# Altium PCB PCB.PcbDoc
Units mil, origin at the board's own origin, x right, y up, seen from the top; angles counter-clockwise.
Board outline 6000 x 4000 mil, 2 copper layers (Top Layer, Bottom Layer); 156 components, 128 nets, 667 pads, 0 vias.
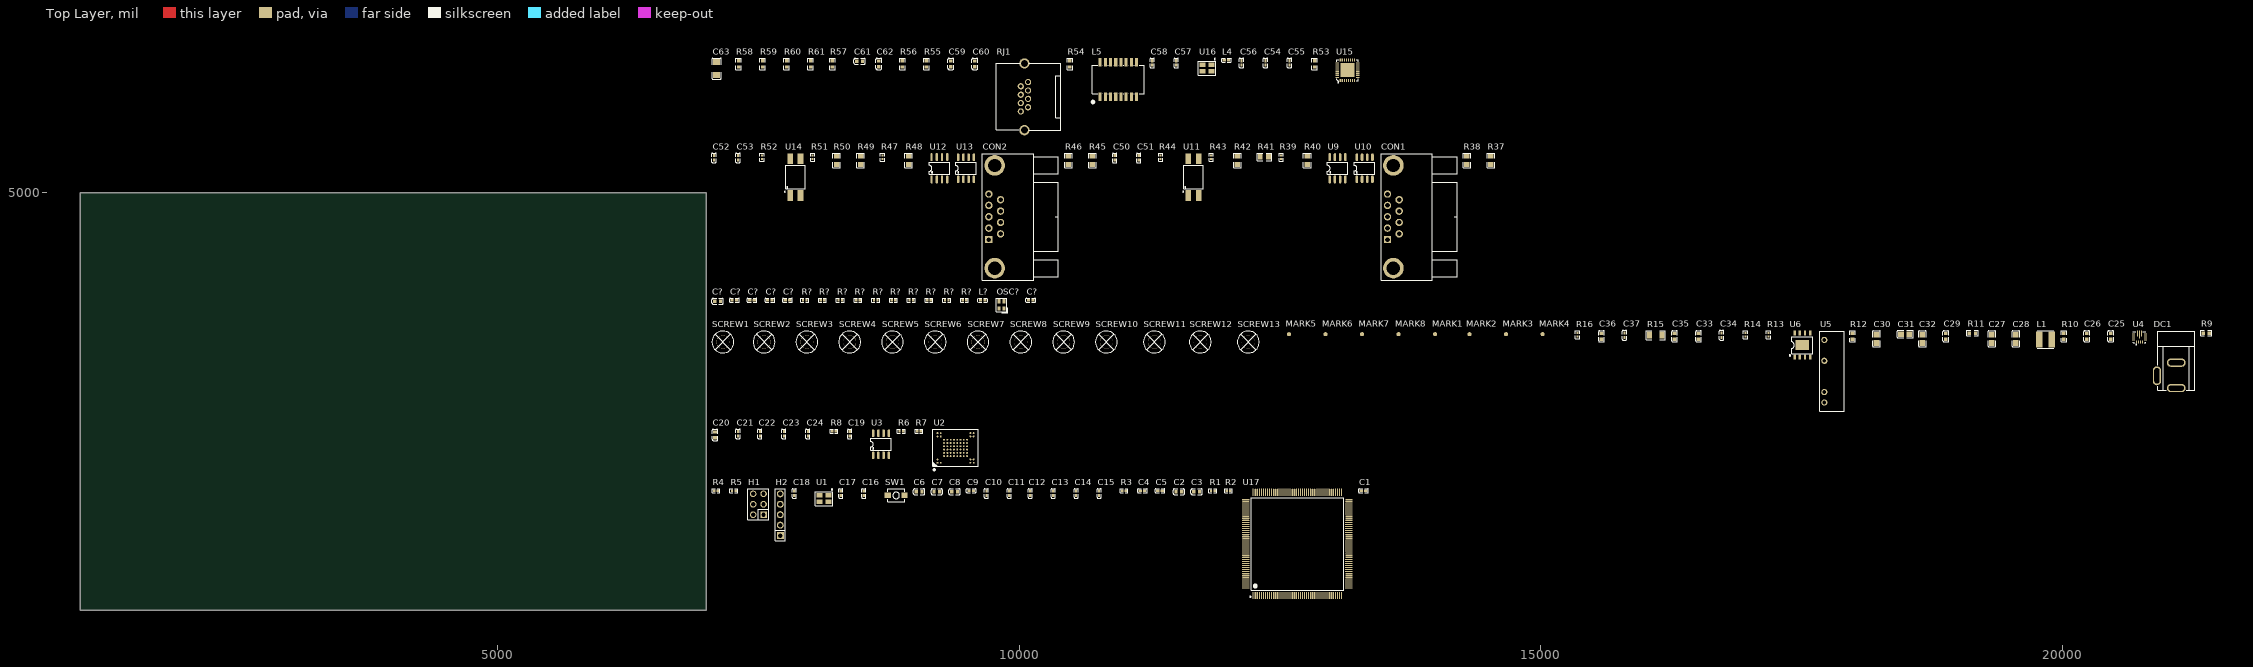
[diagram p0: Top Layer view]
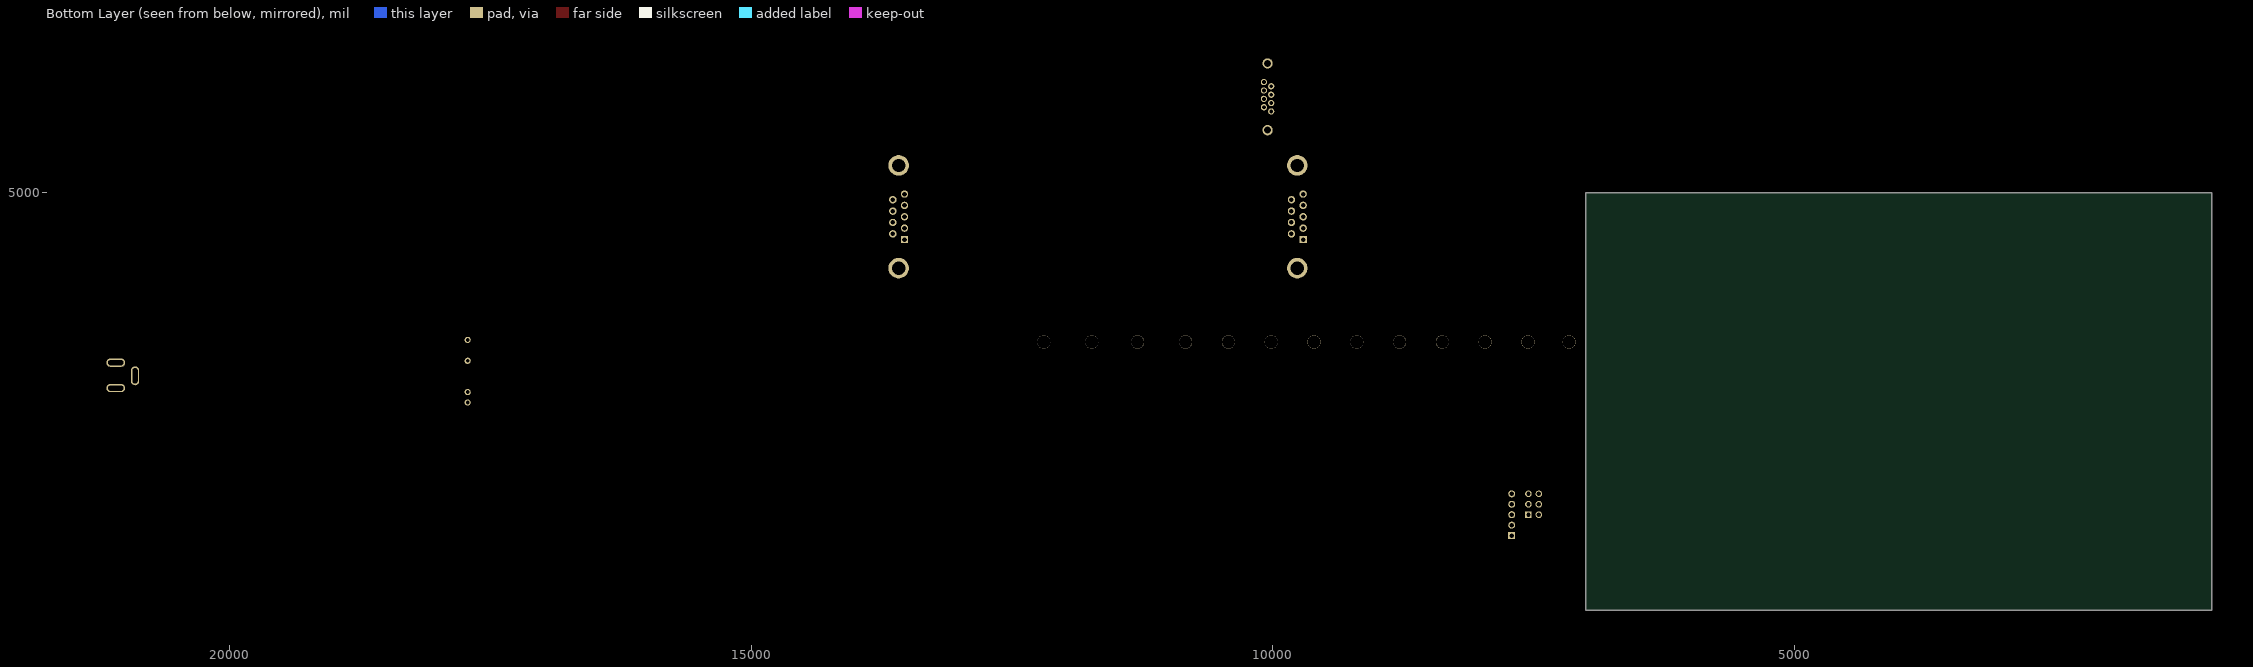
[diagram p1: Bottom Layer view, seen from below]

## Layer stack, top to bottom
Top Solder: solder mask 0.4, Solder Resist, Dk 3.5
Top Layer: signal copper 1.4
Dielectric 1: dielectric 12.6, FR-4, Dk 4.8
Bottom Layer: signal copper 1.4
Bottom Solder: solder mask 0.4, Solder Resist, Dk 3.5

## Board outline
1000,1000 7000,1000 7000,5000 1000,5000

## Design rules (kind name [scope] priority, off if disabled: settings)
Clearance [All] p1: gap=10 ignorepadtopadclearanceinfootprint=FALSE
MinimumSolderMaskSliver [All] p1: minsoldermaskwidth=0
PolygonConnect [All] p1: connectstyle=Relief reliefconductorwidth=10 reliefentries=4 polygonreliefangle="90 Angle" airgapwidth=10
RoutingVias [All] p1: holewidth=28 width=50 viastyle="Through Hole" minholewidth=28 minwidth=50 maxholewidth=28 maxwidth=50
SilkToSilkClearance [All] p1 off: silktosilkclearance=10
SilkToSolderMaskClearance [IsPad] p1: minsilkscreentomaskgap=0 clearancetoexposedcopper=TRUE
SolderMaskExpansion [All] p1 off: expansion=4 istentingtop=FALSE
Width [All] p1: maxlimit=10 minlimit=10 preferedwidth=10
27 further rules are at their usual default settings.

## Components (designator, comment, footprint, x,y, rotation, side; value= is the part's Value field where it differs from the comment)
C1 "100nF" C0402 13300,2145 r0 top
C2 "10uF" C0603 11530,2135 r0 top
C3 "10uF" C0603 11700,2135 r0 top
C4 "2.2uF" C0402 11180,2145 r0 top
C5 "2.2uF" C0402 11350,2145 r0 top
C6 "10uF" C0603 9040,2135 r0 top
C7 "10uF" C0603 9210,2135 r0 top
C8 "10uF" C0603 9380,2135 r0 top
C9 "100nF" C0402 9540,2145 r0 top
C10 "100nF" C0402 9685,2120 r90 top
C11 "100nF" C0402 9905,2120 r90 top
C12 "100nF" C0402 10105,2120 r90 top
C13 "100nF" C0402 10325,2120 r90 top
C14 "100nF" C0402 10545,2120 r90 top
C15 "100nF" C0402 10765,2120 r90 top
C16 "100nF" C0402 8510,2120 r90 top
C17 "22pF" C0402 8290,2120 r90 top
C18 "22pF" C0402 7845,2120 r90 top
C19 "100nF" C0402 8375,2690 r90 top
C20 "10uF" C0603 7085,2680 r90 top
C21 "100nF" C0402 7305,2690 r90 top
C22 "100nF" C0402 7515,2690 r90 top
C23 "100nF" C0402 7745,2690 r90 top
C24 "100nF" C0402 7975,2690 r90 top
C25 "10uF" C0603 20460,3625 r90 top
C26 "100nF" C0603 20230,3625 r90 top
C27 "10uF" C0805 19320,3600 r90 top
C28 "10uF" C0805 19550,3600 r90 top
C29 "10uF" C0603 18880,3625 r90 top
C30 "10uF" C0805 18215,3600 r90 top
C31 "10uF" C0805 18490,3645 r0 top
C32 "10uF" C0805 18655,3600 r90 top
C33 "10uF" C0603 16510,3625 r90 top
C34 "100nF" C0402 16730,3635 r90 top
C35 "10uF" C0603 16280,3625 r90 top
C36 "10uF" C0603 15580,3625 r90 top
C37 "100nF" C0402 15800,3635 r90 top
C50 "100nF" C0402 10915,5335 r90 top
C51 "100nF" C0402 11145,5335 r90 top
C52 "100nF" C0402 7075,5335 r90 top
C53 "100nF" C0402 7305,5335 r90 top
C54 "100nF" C0402 12360,6245 r90 top
C55 "22pF" C0402 12590,6245 r90 top
C56 "100nF" C0402 12130,6245 r90 top
C57 "100nF" C0402 11505,6245 r90 top
C58 "22pF" C0402 11275,6245 r90 top
C59 "100nF" C0603 9345,6235 r90 top
C60 "100nF" C0603 9575,6235 r90 top
C61 "100nF" C0603 8470,6260 r0 top
C62 "100nF" C0603 8655,6235 r90 top
C63 "1nF/2kV" C1206 7100,6190 r90 top
C? "???" C0402 7270,3970 r0 top
C? "???" C0402 10110,3970 r0 top
C? "???" C0402 7440,3970 r0 top
C? "???" C0402 7610,3970 r0 top
C? "10uF" C0603 7110,3960 r0 top
C? "???" C0402 7780,3970 r0 top
CON1 "DB9" DB9-TH_DT10121-M5N3-4F 13585,4770 r90 top
CON2 "DB9" DB9-TH_DT10121-M5N3-4F 9765,4770 r90 top
DC1 "" DC-005_2.5 21075,3255 r90 top
H1 "" HDR-TH_6P-P2.54-V-R2-C3-S2.54_A2541WV-2X3P 7500,2015 r90 top
H2 "" HDR-TH_5P-P2.54-V-M 7710,1915 r90 top
L1 "1.5uH" IND-SMD_L4.0-W4.0_FNR40XXS 19835,3595 r0 top
L4 "10uH" L0402 11985,6270 r0 top
L5 "H1102" XFMR-SMD_H1102N 10950,6085 r0 top
L? "10uH" L0402 9650,3970 r0 top
MARK1 "" Mark-Point-1mm 13985,3645 r90 top
MARK2 "" Mark-Point-1mm 14315,3645 r90 top
MARK3 "" Mark-Point-1mm 14665,3645 r90 top
MARK4 "" Mark-Point-1mm 15015,3645 r90 top
MARK5 "" Mark-Point-1mm 12585,3645 r90 top
MARK6 "" Mark-Point-1mm 12935,3645 r90 top
MARK7 "" Mark-Point-1mm 13285,3645 r90 top
MARK8 "" Mark-Point-1mm 13635,3645 r90 top
OSC? "48MHz" OSC-SMD_4P-L2.0-W1.6-BL 9830,3925 r90 top
R1 "10K" R0402 11855,2145 r0 top
R2 "10R" R0402 12005,2145 r0 top
R3 "10K" R0402 11005,2145 r0 top
R4 "10K" R0402 7095,2145 r0 top
R5 "10K" R0402 7265,2145 r0 top
R6 "10K" R0402 8870,2715 r0 top
R7 "10K" R0402 9040,2715 r0 top
R8 "10K" R0402 8225,2715 r0 top
R9 "10K" R0603 21375,3655 r0 top
R10 "100K" R0603 20010,3625 r90 top
R11 "680K" R0603 19135,3655 r0 top
R12 "130K" R0603 17985,3625 r90 top
R13 "10K" R0402 17180,3640 r90 top
R14 "56K" R0402 16960,3640 r90 top
R15 "510R" R1206 16100,3635 r0 top
R16 "10K" R0402 15350,3640 r90 top
R37 "0R" R0805 14520,5310 r90 top
R38 "DNP" R0805 14290,5310 r90 top
R39 "22R" R0402 12510,5340 r90 top
R40 "DNP" R0805 12760,5310 r90 top
R41 "DNP" R0805 12350,5345 r0 top
R42 "0R" R0805 12090,5310 r90 top
R43 "4.7K" R0402 11840,5340 r90 top
R44 "330R" R0402 11355,5340 r90 top
R45 "0R" R0805 10700,5310 r90 top
R46 "DNP" R0805 10470,5310 r90 top
R47 "22R" R0402 8690,5340 r90 top
R48 "DNP" R0805 8940,5310 r90 top
R49 "DNP" R0805 8480,5310 r90 top
R50 "0R" R0805 8250,5310 r90 top
R51 "4.7K" R0402 8020,5340 r90 top
R52 "330R" R0402 7535,5340 r90 top
R53 "2.49K" R0603 12830,6235 r90 top
R54 "49.9R" R0603 10485,6235 r90 top
R55 "49.9R" R0603 9110,6235 r90 top
R56 "49.9R" R0603 8880,6235 r90 top
R57 "49.9R" R0603 8210,6235 r90 top
R58 "75R" R0603 7310,6235 r90 top
R59 "75R" R0603 7540,6235 r90 top
R60 "75R" R0603 7770,6235 r90 top
R61 "75R" R0603 8000,6235 r90 top
R? "???" R0402 8455,3970 r0 top
R? "???" R0402 9475,3970 r0 top
R? "???" R0402 7945,3970 r0 top
R? "???" R0402 8115,3970 r0 top
R? "???" R0402 9305,3970 r0 top
R? "???" R0402 8625,3970 r0 top
R? "???" R0402 8795,3970 r0 top
R? "???" R0402 8965,3970 r0 top
R? "???" R0402 8285,3970 r0 top
R? "???" R0402 9135,3970 r0 top
RJ1 "RJ45" RJ45-TH_R-RJ45R10P-B000-1 10050,5920 r90 top
SCREW1 "" M3 7160,3570 r90 top
SCREW2 "" M3 7555,3570 r90 top
SCREW3 "" M3 7965,3570 r90 top
SCREW4 "" M3 8375,3570 r90 top
SCREW5 "" M3 8785,3570 r90 top
SCREW6 "" M3 9195,3570 r90 top
SCREW7 "" M3 9605,3570 r90 top
SCREW8 "" M3 10015,3570 r90 top
SCREW9 "" M3 10425,3570 r90 top
SCREW10 "" M3 10835,3570 r90 top
SCREW11 "" M3 11295,3570 r90 top
SCREW12 "" M3 11735,3570 r90 top
SCREW13 "" M3 12195,3570 r90 top
SW1 "" Key_SMD_3x4x2 8820,2100 r0 top
U1 "25MHz" CRYSTAL-SMD_4P-L3.2-W2.5-TR 8130,2070 r0 top
U2 "MT29F4G08A" VFBGA-63_L11.0-W9.0-P0.80-BL_MT29F2G08ABAEAH4-IT-E 9390,2555 r0 top
U3 "24C02" SOP-8_L4.9-W3.9-P1.27-LS6.0-BL 8675,2590 r0 top
U4 "TPS63070R" VQFN-HR-15_L3.0-W2.5-P0.50-BL_TPS63070RNMR 20735,3610 r0 top
U5 "NMV0505SAC" PWRM-TH_4P-L19.5-W6.0-P2.54_NMV0505SAC 17715,3290 r90 top
U6 "RT9048" ESOP-8_L4.9-W3.9-P1.27-LS6.0-BL-EP 17505,3540 r0 top
U9 "" SOIC-8_L5.0-W4.0-P1.27-LS6.0-BL 13050,5235 r0 top
U10 "" SOP-8_L4.9-W3.9-P1.27-LS6.0-BL 13310,5235 r0 top
U11 "" SOP-4_L6.5-W4.6-P2.54-LS10.3-TL 11670,5150 r90 top
U12 "" SOIC-8_L5.0-W4.0-P1.27-LS6.0-BL 9235,5235 r0 top
U13 "" SOP-8_L4.9-W3.9-P1.27-LS6.0-BL 9490,5235 r0 top
U14 "" SOP-4_L6.5-W4.6-P2.54-LS10.3-TL 7855,5150 r90 top
U15 "" QFN-32_L5.0-W5.0-P0.50-BL-EP3.4 13145,6175 r0 top
U16 "25MHz" CRYSTAL-SMD_4P-L3.2-W2.5-TR 11800,6195 r0 top
U17 "" LQFP-176_L24.0-W24.0-P0.50-LS26.0-BL 12665,1635 r0 top

## Footprints (in the part's own frame and the unit in brackets; to place one, negate y for a bottom-side part, rotate by r counter-clockwise, add the part's x,y. Pads: shape width x height; smd on the part's side, far side on the other; paste and mask are expansions set on the pad)
C0402 [mm]
  rect 0.79x0.54 smd paste-100 mask+0.051: 1(-0.545,0) 2(0.545,0)
  silkscreen extent -1.17,-0.5 1.17,0.5
C0603 [mm]
  rect 0.8x0.9 smd: 1(-0.7,0) 2(0.7,0)
  silkscreen extent -1.39,-0.71 1.39,0.71
C0805 [mm]
  rect 1.41x1.35 smd paste-100 mask+0.051: 1(-1,0) 2(1,0)
  silkscreen extent -1.96,-0.9 1.96,0.9
C1206 [mm]
  rect 1.485x1.728 smd paste-100 mask+0.051: 1(-1.593,0) 2(1.593,0)
  silkscreen extent -2.56,-1.09 2.56,1.09
CRYSTAL-SMD_4P-L3.2-W2.5-TR [mm]
  rect 1.4x1.15 smd: 1(1.1,0.8) 2(-1.1,0.8) 3(-1.1,-0.8) 4(1.1,-0.8)
  silkscreen extent -2.1,-1.7 2.1,2.35
DB9-TH_DT10121-M5N3-4F [mm]
  rect 1.8x1.8 hole 1.1: 1(-5.54,1.42)
  round 1.8 hole 1.1: 2(-2.77,1.42) 3(0,1.42) 4(2.77,1.42) 5(5.54,1.42) 6(-4.155,-1.42) 7(-1.385,-1.42) 8(1.385,-1.42) 9(4.155,-1.42)
  round 5 hole 3.25: 10(-12.5,0) 11(12.5,0)
  silkscreen extent -15.4,-15.5 15.4,3
DC-005_2.5 [mm]
  oval 2x4.6 hole 1.2 slot 3.7 at 90 deg paste-2539.97 mask+0.051: 1(-3.227,-0.318) 2(2.973,-0.318)
  oval 4.6x2 hole 1.2 slot 3.7 at 0 deg paste-2539.97 mask+0.051: 3(-0.227,4.382)
  silkscreen extent -3.73,-4.82 10.67,4.18
ESOP-8_L4.9-W3.9-P1.27-LS6.0-BL-EP [mm]
  rect 0.6x1.2 smd: 1(-1.905,-2.908) 2(-0.635,-2.908) 3(0.635,-2.908) 4(1.905,-2.908) 5(1.905,2.908) 6(0.635,2.908) 7(-0.635,2.908) 8(-1.905,2.908)
  rect 3.3x2.4 smd: 9(0,0)
  silkscreen extent -3.2,-2.67 2.55,2.05
HDR-TH_5P-P2.54-V-M [mm]
  rect 1.7x1.7 hole 1.1: 1(-5.08,0)
  round 1.7 hole 1.1: 2(-2.54,0) 3(0,0) 4(2.54,0) 5(5.08,0)
  silkscreen extent -6.35,-1.27 6.35,1.27
HDR-TH_6P-P2.54-V-R2-C3-S2.54_A2541WV-2X3P [mm]
  rect 1.6x1.6 hole 1.05: 1(-2.54,-1.27)
  round 1.6 hole 1.05: 2(-2.54,1.27) 3(0,-1.27) 4(0,1.27) 5(2.54,-1.27) 6(2.54,1.27)
  silkscreen extent -3.81,-2.54 3.81,2.54
IND-SMD_L4.0-W4.0_FNR40XXS [mm]
  rect 1.6x3.9 smd: 1(-1.5,0) 2(1.5,0)
  silkscreen extent -2,-2.1 2,2.1
Key_SMD_3x4x2 [mm]
  rect 1.53x1.36 smd paste+0 mask+0.051: 1(-2.035,0) 2(2.035,0)
  silkscreen extent -2.08,-1.58 2.08,1.58
L0402 [mm]
  rect 0.79x0.54 smd paste-100 mask+0.051: 1(-0.545,0) 2(0.545,0)
  silkscreen extent -1.17,-0.5 1.17,0.5
LQFP-176_L24.0-W24.0-P0.50-LS26.0-BL [mm]
  oval 0.28x1.8 smd: 1(-10.75,-12.55) 2(-10.25,-12.55) 3(-9.75,-12.55) 4(-9.25,-12.55) 5(-8.75,-12.55) 6(-8.25,-12.55) 7(-7.75,-12.55) 8(-7.25,-12.55) 9(-6.75,-12.55) 10(-6.25,-12.55) 11(-5.75,-12.55) 12(-5.25,-12.55) 13(-4.75,-12.55) 14(-4.25,-12.55) 15(-3.75,-12.55) 16(-3.25,-12.55) 17(-2.75,-12.55) 18(-2.25,-12.55) 19(-1.75,-12.55) 20(-1.25,-12.55) 21(-0.75,-12.55) 22(-0.25,-12.55) 23(0.25,-12.55) 24(0.75,-12.55) 25(1.25,-12.55) 26(1.75,-12.55) 27(2.25,-12.55) 28(2.75,-12.55) 29(3.25,-12.55) 30(3.75,-12.55) 31(4.25,-12.55) 32(4.75,-12.55) 33(5.25,-12.55) 34(5.75,-12.55) 35(6.25,-12.55) 36(6.75,-12.55) 37(7.25,-12.55) 38(7.75,-12.55) 39(8.25,-12.55) 40(8.75,-12.55) 41(9.25,-12.55) 42(9.75,-12.55) 43(10.25,-12.55) 44(10.75,-12.55) 89(10.75,12.55) 90(10.25,12.55) 91(9.75,12.55) 92(9.25,12.55) 93(8.75,12.55) 94(8.25,12.55) 95(7.75,12.55) 96(7.25,12.55) 97(6.75,12.55) 98(6.25,12.55) 99(5.75,12.55) 100(5.25,12.55) 101(4.75,12.55) 102(4.25,12.55) 103(3.75,12.55) 104(3.25,12.55) 105(2.75,12.55) 106(2.25,12.55) 107(1.75,12.55) 108(1.25,12.55) 109(0.75,12.55) 110(0.25,12.55) 111(-0.25,12.55) 112(-0.75,12.55) 113(-1.25,12.55) 114(-1.75,12.55) 115(-2.25,12.55) 116(-2.75,12.55) 117(-3.25,12.55) 118(-3.75,12.55) 119(-4.25,12.55) 120(-4.75,12.55) 121(-5.25,12.55) 122(-5.75,12.55) 123(-6.25,12.55) 124(-6.75,12.55) 125(-7.25,12.55) 126(-7.75,12.55) 127(-8.25,12.55) 128(-8.75,12.55) 129(-9.25,12.55) 130(-9.75,12.55) 131(-10.25,12.55) 132(-10.75,12.55)
  oval 1.8x0.28 smd: 45(12.55,-10.75) 46(12.55,-10.25) 47(12.55,-9.75) 48(12.55,-9.25) 49(12.55,-8.75) 50(12.55,-8.25) 51(12.55,-7.75) 52(12.55,-7.25) 53(12.55,-6.75) 54(12.55,-6.25) 55(12.55,-5.75) 56(12.55,-5.25) 57(12.55,-4.75) 58(12.55,-4.25) 59(12.55,-3.75) 60(12.55,-3.25) 61(12.55,-2.75) 62(12.55,-2.25) 63(12.55,-1.75) 64(12.55,-1.25) 65(12.55,-0.75) 66(12.55,-0.25) 67(12.55,0.25) 68(12.55,0.75) 69(12.55,1.25) 70(12.55,1.75) 71(12.55,2.25) 72(12.55,2.75) 73(12.55,3.25) 74(12.55,3.75) 75(12.55,4.25) 76(12.55,4.75) 77(12.55,5.25) 78(12.55,5.75) 79(12.55,6.25) 80(12.55,6.75) 81(12.55,7.25) 82(12.55,7.75) 83(12.55,8.25) 84(12.55,8.75) 85(12.55,9.25) 86(12.55,9.75) 87(12.55,10.25) 88(12.55,10.75) 133(-12.55,10.75) 134(-12.55,10.25) 135(-12.55,9.75) 136(-12.55,9.25) 137(-12.55,8.75) 138(-12.55,8.25) 139(-12.55,7.75) 140(-12.55,7.25) 141(-12.55,6.75) 142(-12.55,6.25) 143(-12.55,5.75) 144(-12.55,5.25) 145(-12.55,4.75) 146(-12.55,4.25) 147(-12.55,3.75) 148(-12.55,3.25) 149(-12.55,2.75) 150(-12.55,2.25) 151(-12.55,1.75) 152(-12.55,1.25) 153(-12.55,0.75) 154(-12.55,0.25) 155(-12.55,-0.25) 156(-12.55,-0.75) 157(-12.55,-1.25) 158(-12.55,-1.75) 159(-12.55,-2.25) 160(-12.55,-2.75) 161(-12.55,-3.25) 162(-12.55,-3.75) 163(-12.55,-4.25) 164(-12.55,-4.75) 165(-12.55,-5.25) 166(-12.55,-5.75) 167(-12.55,-6.25) 168(-12.55,-6.75) 169(-12.55,-7.25) 170(-12.55,-7.75) 171(-12.55,-8.25) 172(-12.55,-8.75) 173(-12.55,-9.25) 174(-12.55,-9.75) 175(-12.55,-10.25) 176(-12.55,-10.75)
  silkscreen extent -11.57,-13.03 11.25,11.25
M3 [mil]
  round 126 hole 126 paste-99999 mask+4: 1(0,0)
  silkscreen extent -105,-105 105,105
Mark-Point-1mm [mm]
  round 1 smd paste-25.4 mask+0.5: 1(0,0)
OSC-SMD_4P-L2.0-W1.6-BL [mm]
  rect 1x0.8 smd: 1(-0.9,-0.6) 2(0.9,-0.6) 3(0.9,0.6) 4(-0.9,0.6)
  silkscreen extent -1.89,-1.56 1.65,1.33
PWRM-TH_4P-L19.5-W6.0-P2.54_NMV0505SAC [mm]
  round 1.5 hole 0.9 paste-2539.97 mask+0.05: 1(-7.62,0) 2(-5.08,0) 5(2.54,0) 7(7.62,0)
  silkscreen extent -9.78,-4.83 9.78,1.14
QFN-32_L5.0-W5.0-P0.50-BL-EP3.4 [mm]
  rect 0.28x0.8 smd paste-100 mask+0.05: 1(-1.75,-2.5) 2(-1.251,-2.5) 3(-0.751,-2.5) 4(-0.251,-2.5) 5(0.249,-2.5) 6(0.749,-2.5) 7(1.249,-2.5) 8(1.749,-2.5) 17(1.752,2.5) 18(1.251,2.5) 19(0.752,2.5) 20(0.251,2.5) 21(-0.248,2.5) 22(-0.749,2.5) 23(-1.248,2.5) 24(-1.749,2.5)
  rect 0.8x0.28 smd paste-100 mask+0.05: 9(2.5,-1.748) 10(2.5,-1.248) 11(2.5,-0.748) 12(2.5,-0.248) 13(2.5,0.252) 14(2.5,0.752) 15(2.5,1.252) 16(2.5,1.752) 25(-2.5,1.75) 26(-2.5,1.25) 27(-2.5,0.75) 28(-2.5,0.25) 29(-2.5,-0.25) 30(-2.5,-0.75) 31(-2.5,-1.25) 32(-2.5,-1.75)
  rect 3.4x3.4 smd paste-100 mask+0.05: 33(0,0)
  silkscreen extent -2.6,-3.12 2.6,2.6
R0402 [mm]
  rect 0.566x0.54 smd paste-100 mask+0.051: 1(-0.433,0) 2(0.433,0)
  silkscreen extent -0.94,-0.5 0.94,0.5
R0603 [mil]
  rect 31.75x34.02 smd paste-3937.01 mask+2: 1(-29.66,0) 2(29.66,0)
  silkscreen extent -55,-26 55,26
R0805 [mm]
  rect 1.133x1.377 smd paste-100 mask+0.051: 1(-1,0) 2(1,0)
  silkscreen extent -1.76,-0.92 1.76,0.92
R1206 [mil]
  rect 47.54x66.97 smd paste-3937.01 mask+2: 1(-58.22,0) 2(58.22,0)
  silkscreen extent -91,-42 91,42
RJ45-TH_R-RJ45R10P-B000-1 [mil]
  round 60 hole 36 paste-99999 mask+1.97: 1(140.55,-35.04) 2(100.39,35.04) 3(60.23,-35.04) 4(20.08,35.04) 5(-20.08,-35.04) 6(-60.24,35.04) 7(-100.4,-35.04) 8(-140.55,35.04)
  round 98.42 hole 66.93 paste-99999 mask+1.97: 9(319.89,0) 10(-319.89,0)
  silkscreen extent -320,-350 320,270
SOIC-8_L5.0-W4.0-P1.27-LS6.0-BL [mil]
  oval 22.38x76.78 smd: 1(-75,-106.5) 2(-25,-106.5) 3(25,-106.5) 4(75,-106.5) 5(75,106.5) 6(25,106.5) 7(-25,106.5) 8(-75,106.5)
  silkscreen extent -98,-59 98,59
SOP-4_L6.5-W4.6-P2.54-LS10.3-TL [mil]
  rect 102.36x56 smd: 1(-175.2,50) 2(-175.2,-50) 3(175.2,-50) 4(175.2,50)
  silkscreen extent -145,-94 112,105
SOP-8_L4.9-W3.9-P1.27-LS6.0-BL [mm]
  oval 0.63x1.865 smd: 1(-1.905,-2.682) 2(-0.635,-2.682) 3(0.635,-2.682) 4(1.905,-2.682) 5(1.905,2.682) 6(0.635,2.682) 7(-0.635,2.682) 8(-1.905,2.682)
  silkscreen extent -2.5,-1.5 2.5,1.48
VFBGA-63_L11.0-W9.0-P0.80-BL_MT29F2G08ABAEAH4-IT-E [mm]
  round 0.45 smd: A1(-4.4,-3.6) A2(-4.4,-2.8) A9(-4.4,2.8) A10(-4.4,3.6) B1(-3.6,-3.6) B9(-3.6,2.8) B10(-3.6,3.6) C3(-2.8,-2) C4(-2.8,-1.2) C5(-2.8,-0.4) C6(-2.8,0.4) C7(-2.8,1.2) C8(-2.8,2) D3(-2,-2) D4(-2,-1.2) D5(-2,-0.4) D6(-2,0.4) D7(-2,1.2) D8(-2,2) E3(-1.2,-2) E4(-1.2,-1.2) E5(-1.2,-0.4) E6(-1.2,0.4) E7(-1.2,1.2) E8(-1.2,2) F3(-0.4,-2) F4(-0.4,-1.2) F5(-0.4,-0.4) F6(-0.4,0.4) F7(-0.4,1.2) F8(-0.4,2) G3(0.4,-2) G4(0.4,-1.2) G5(0.4,-0.4) G6(0.4,0.4) G7(0.4,1.2) G8(0.4,2) H3(1.2,-2) H4(1.2,-1.2) H5(1.2,-0.4) H6(1.2,0.4) H7(1.2,1.2) H8(1.2,2) J3(2,-2) J4(2,-1.2) J5(2,-0.4) J6(2,0.4) J7(2,1.2) J8(2,2) K3(2.8,-2) K4(2.8,-1.2) K5(2.8,-0.4) K6(2.8,0.4) K7(2.8,1.2) K8(2.8,2) L1(3.6,-3.6) L2(3.6,-2.8) L9(3.6,2.8) L10(3.6,3.6) M1(4.4,-3.6) M2(4.4,-2.8) M9(4.4,2.8) M10(4.4,3.6)
  silkscreen extent -5.5,-5.5 5.5,4.5
VQFN-HR-15_L3.0-W2.5-P0.50-BL_TPS63070RNMR [mm]
  rect 0.25x0.7 smd: 1(-0.75,-1.016) 2(-0.25,-1.016) 3(0.25,-1.016) 4(0.75,-1.016)
  rect 0.7x0.25 smd: 5(1.45,-0.566) 6(1.45,-0.066) 7(1.45,0.434) 8(1.45,0.934) 12(-1.45,0.934) 13(-1.45,0.434) 14(-1.45,-0.066) 15(-1.45,-0.566)
  rect 0.25x1.45 smd: 9(0.5,1.016) 11(-0.5,1.016)
  rect 0.25x1.85 smd: 10(0,0.816)
  silkscreen extent -1.5,-1.73 1.5,1.44
XFMR-SMD_H1102N [mm]
  rect 0.75x2 smd: 1(-4.445,-4.2) 2(-3.175,-4.2) 3(-1.905,-4.2) 4(-0.635,-4.2) 5(0.635,-4.2) 6(1.905,-4.2) 7(3.175,-4.2) 8(4.445,-4.2) 9(4.445,4.2) 10(3.175,4.2) 11(1.905,4.2) 12(0.635,4.2) 13(-0.635,4.2) 14(-1.905,4.2) 15(-3.175,4.2) 16(-4.445,4.2)
  silkscreen extent -6.73,-5.99 6.35,3.5

## Part data
C1 C4 C5 C9 C10 C11 C12 C13 C14 C15 C16 C17 C18 C19 C21 C22 C23 C24 C34 C37 C50 C51 C52 C53 C54 C55 C56 C57 C58 C? C? C? C? C?: library part CAP_0402, Add into BOM=yes, Convert to PCB=yes, Device=CAP_0402, Symbol=CapAcitance
C2 C3 C6 C7 C8 C20 C25 C26 C29 C33 C35 C36 C59 C60 C61 C62 C?: library part CAP_0603, Add into BOM=yes, Convert to PCB=yes, Device=CAP_0603, Symbol=CapAcitance
C27 C28 C30 C31 C32: library part CAP_0805, Add into BOM=yes, Convert to PCB=yes, Device=CAP_0805, Symbol=CapAcitance
C63: library part 1206B102K202NT, Tolerance=±10%, Add into BOM=yes, Convert to PCB=yes, Device=1206B102K202NT, Symbol=1206B102K202NT
CON1 CON2: library part "DB9 TH90", Add into BOM=yes, Convert to PCB=yes, Device="DB9 TH90", Manufacturer Part=DB9, Symbol="DB9 TH90"
DC1: library part DC-005_2.5, Add into BOM=yes, Convert to PCB=yes, Device=DC-005_2.5, Symbol=DC-005_2.5
H1: library part HDR-M_2.54_2x3, Add into BOM=yes, Convert to PCB=yes, Device=HDR-M_2.54_2x3, Symbol=HDR-M-2.54_2x3
H2: library part HDR-M_2.54_1x5P, Add into BOM=yes, Convert to PCB=yes, Device=HDR-M_2.54_1x5P, Symbol=MTP125-1105S1
L1: library part FNR4020S1R5MT, Tolerance=±20%, Add into BOM=yes, Convert to PCB=yes, Device=FNR4020S1R5MT, Symbol=FNR4020S1R5MT
L4 L?: library part L_0402, Add into BOM=yes, Convert to PCB=yes, Device=L_0402, Symbol=SDCL1005C10NJTDFM01
L5: library part H1102N, Add into BOM=yes, Convert to PCB=yes, Device=H1102N, Symbol=H1102N
MARK1 MARK2 MARK3 MARK4 MARK5 MARK6 MARK7 MARK8: library part Mark-Point, Add into BOM=no, Convert to PCB=yes, Device=Mark-Point, Symbol=Mark-Point
OSC?: library part CA20C4805INT, JLCPCB Part Class=扩展库, Manufacturer=CTS(西迪斯), operating temperature=-40℃~+85℃, Supply Current (Max)=15mA, Supply Voltage=2.5V, Add into BOM=yes, Convert to PCB=yes, Datasheet=https://atta.szlcsc.com/upload/public/pdf/source/20210702/BDFC52EAD60C3547BAEE0A1F7A9586ED.pdf, Device=CA20C4805INT, LCSC Part Name=CA20C4805INT, Manufacturer Part=CA20C4805INT, Output Type=HCMOS；TTL, Supplier=LCSC, Supplier Footprint=SMD2016-4P, Supplier Part=C1990976, Symbol=CA20C4805INT
R1 R2 R3 R4 R5 R6 R7 R8 R13 R14 R16 R39 R43 R44 R47 R51 R52 R? R? R? R? R? R? R? R? R? R?: library part Res_0402, Add into BOM=yes, Convert to PCB=yes, Device=Res_0402, Symbol=电阻
R9 R10 R11 R12 R53 R54 R55 R56 R57 R58 R59 R60 R61: library part Res_0603, Add into BOM=yes, Convert to PCB=yes, Device=Res_0603, Symbol=电阻
R15: library part Res_1206, Add into BOM=yes, Convert to PCB=yes, Device=Res_1206, Symbol=电阻
R37 R38 R40 R41 R42 R45 R46 R48 R49 R50: library part Res_0805, Add into BOM=yes, Convert to PCB=yes, Device=Res_0805, Symbol=电阻
RJ1: library part RJ45-9758-1, Add into BOM=yes, Convert to PCB=yes, Device=RJ45-9758-1, Manufacturer Part=RJ45, Symbol=RJ45-9758-1
SCREW1 SCREW2 SCREW3 SCREW4 SCREW5 SCREW6 SCREW7 SCREW8 SCREW9 SCREW10 SCREW11 SCREW12 SCREW13: library part M3螺丝, Add into BOM=yes, Convert to PCB=yes, Device=M3螺丝, Supplier Footprint=插件, Symbol=螺丝孔
SW1: library part Key_SMD_3x4x2, Add into BOM=yes, Convert to PCB=yes, Device=Key_SMD_3x4x2, Supplier Footprint=SMD, Symbol=轻触按键x2
U4: library part TPS63070RNMR, Output Current=-, Add into BOM=yes, Convert to PCB=yes, Device=TPS63070RNMR, Manufacturer Part=TPS63070R, Symbol=TPS63070RNMR
U6: library part RT9048GSP, Add into BOM=yes, Convert to PCB=yes, Device=RT9048GSP, Manufacturer Part=RT9048, Symbol=RT9048GSP
U9 U12: library part ISO7221AD, Add into BOM=yes, Convert to PCB=yes, Device=ISO7221AD, Symbol=ISO7221AD
U10 U13: library part RS485, Add into BOM=yes, Convert to PCB=yes, Device=RS485, Symbol=RS485
U11 U14: library part TLP781(GR-TP6,F), Add into BOM=yes, Convert to PCB=yes, Device=TLP781(GR-TP6,F), Symbol=TLP781(GR-TP6，F)
U15: library part YT8512C, Add into BOM=yes, Convert to PCB=yes, Device=YT8512C, Symbol=YT8512C
U17: library part STM32F429IGT6, Add into BOM=yes, Applications=-, Convert to PCB=yes, Device=STM32F429IGT6, Relevance=|, Symbol=STM32F429IGT6
U1 U16: Add into BOM=yes, Convert to PCB=yes, Device=25MHz, Manufacturer Part=25MHz, Symbol=25MHZ
U2: Add into BOM=yes, Convert to PCB=yes, Device=MT29F4G08A, Manufacturer Part=MT29F4G08A, Symbol=MT29F4G08A
U3: Add into BOM=yes, Convert to PCB=yes, Device=24C02, Manufacturer Part=24C02, Symbol=24C02
U5: Add into BOM=yes, Convert to PCB=yes, Device=NMV0505SAC, Manufacturer Part=NMV0505SAC, Symbol=NMV0505SAC

## Nets (pads, with @x,y where several pads share a name; then routed paths per layer and width w, separated by ;. In a path a pad name is that pad's centre, name@x,y a point inside that pad or via, vN(x,y) a via of type N, cw(c..) or ccw(c..) an arc to the next point about the centre after c; other vN are vias at no path point)
BOOT0: 
BOOT1: 
DGND: 
ETH_MDC: 
ETH_MDIO: 
ETH_OSCI: 
ETH_OSCO: 
ETH_RX_N: 
ETH_RX_P: 
ETH_TX_N: 
ETH_TX_P: 
FMC_ALE: 
FMC_CLE: 
FMC_D0: 
FMC_D1: 
FMC_D2: 
FMC_D3: 
FMC_D4: 
FMC_D5: 
FMC_D6: 
FMC_D7: 
FMC_N_CE: 
FMC_N_OE: 
FMC_N_WAIT: 
FMC_N_WE: 
GROUND: 
IIC_SCL: 
IIC_SDA: 
NetC1_2: 
NetC2_2: 
NetC4_2: 
NetC5_2: 
NetC26_1: 
NetC54_1: 
NetC56_2: 
NetC57_2: 
NetC59_2: 
NetC60_2: 
NetC61_2: 
NetC62_2: 
NetC63_2: 
NetCON1_5: 
NetCON1_6: 
NetCON2_5: 
NetCON2_6: 
NetH1_3: 
NetH1_4: 
NetL1_1: 
NetL1_2: 
NetL5_10: 
NetL5_15: 
NetR1_2: 
NetR8_2: 
NetR9_1: 
NetR10_1: 
NetR11_2: 
NetR13_2: 
NetR14_2: 
NetR39_2: 
NetR43_1: 
NetR44_2: 
NetR47_2: 
NetR51_1: 
NetR52_2: 
NetR53_2: 
NetR60_2: 
NetR61_2: 
NetU9_6: 
NetU9_7: 
NetU10_2: 
NetU12_6: 
NetU12_7: 
NetU13_2: 
OSC_IN: 
OSC_OUT: 
PB1_RTS: 
PB1_RXD: 
PB1_TXD: 
PB2_RTS: 
PB2_RXD: 
PB2_TXD: 
PBUS1_A: 
PBUS1_B: 
PBUS2_A: 
PBUS2_B: 
PF_AB0: 
PF_AB1: 
PF_AB2: 
PF_AB3: 
PF_AB4: 
PF_AB5: 
PF_AB6: 
PF_AB7: 
PF_AB8: 
PF_AB9: 
PF_AB10: 
PF_DB0: 
PF_DB1: 
PF_DB2: 
PF_DB3: 
PF_DB4: 
PF_DB5: 
PF_DB6: 
PF_DB7: 
PF_NCS1: 
PF_NCS2: 
PF_NRD: 
PF_NREADY1: 
PF_NREADY2: 
PF_NWR: 
RESET: 
RMII_CRS_DV: 
RMII_RXD0: 
RMII_RXD1: 
RMII_TX_EN: 
RMII_TXD0: 
RMII_TXD1: 
RX_N: 
RX_P: 
SWCLK: 
SWDIO: 
TX_N: 
TX_P: 
VCC33V: 
VDD50V: 
VIN12V: 
XGND: 
XVDD50V: 
pads on no net: C1.1 C1.2 C2.1 C2.2 C3.1 C3.2 C4.1 C4.2 C5.1 C5.2 C6.1 C6.2 C7.1 C7.2 C8.1 C8.2 C9.1 C9.2 C10.1 C10.2 C11.1 C11.2 C12.1 C12.2 C13.1 C13.2 C14.1 C14.2 C15.1 C15.2 C16.1 C16.2 C17.1 C17.2 C18.1 C18.2 C19.1 C19.2 C20.1 C20.2 C21.1 C21.2 C22.1 C22.2 C23.1 C23.2 C24.1 C24.2 C25.1 C25.2 C26.1 C26.2 C27.1 C27.2 C28.1 C28.2 C29.1 C29.2 C30.1 C30.2 C31.1 C31.2 C32.1 C32.2 C33.1 C33.2 C34.1 C34.2 C35.1 C35.2 C36.1 C36.2 C37.1 C37.2 C50.1 C50.2 C51.1 C51.2 C52.1 C52.2 C53.1 C53.2 C54.1 C54.2 C55.1 C55.2 C56.1 C56.2 C57.1 C57.2 C58.1 C58.2 C59.1 C59.2 C60.1 C60.2 C61.1 C61.2 C62.1 C62.2 C63.1 C63.2 C?.1 C?.2 CON1.1 CON1.2 CON1.3 CON1.4 CON1.5 CON1.6 CON1.7 CON1.8 CON1.9 CON1.10 CON1.11 CON2.1 CON2.2 CON2.3 CON2.4 CON2.5 CON2.6 CON2.7 CON2.8 CON2.9 CON2.10 CON2.11 DC1.1 DC1.2 DC1.3 H1.1 H1.2 H1.3 H1.4 H1.5 H1.6 H2.1 H2.2 H2.3 H2.4 H2.5 L1.1 L1.2 L4.1 L4.2 L5.1 L5.2 L5.3 L5.4 L5.5 L5.6 L5.7 L5.8 L5.9 L5.10 L5.11 L5.12 L5.13 L5.14 L5.15 L5.16 L?.1 L?.2 MARK1.1 MARK2.1 MARK3.1 MARK4.1 MARK5.1 MARK6.1 MARK7.1 MARK8.1 OSC?.1 OSC?.2 OSC?.3 OSC?.4 R1.1 R1.2 R2.1 R2.2 R3.1 R3.2 R4.1 R4.2 R5.1 R5.2 R6.1 R6.2 R7.1 R7.2 R8.1 R8.2 R9.1 R9.2 R10.1 R10.2 R11.1 R11.2 R12.1 R12.2 R13.1 R13.2 R14.1 R14.2 R15.1 R15.2 R16.1 R16.2 R37.1 R37.2 R38.1 R38.2 R39.1 R39.2 R40.1 R40.2 R41.1 R41.2 R42.1 R42.2 R43.1 R43.2 R44.1 R44.2 R45.1 R45.2 R46.1 R46.2 R47.1 R47.2 R48.1 R48.2 R49.1 R49.2 R50.1 R50.2 R51.1 R51.2 R52.1 R52.2 R53.1 R53.2 R54.1 R54.2 R55.1 R55.2 R56.1 R56.2 R57.1 R57.2 R58.1 R58.2 R59.1 R59.2 R60.1 R60.2 R61.1 R61.2 R?.1 R?.2 RJ1.1 RJ1.2 RJ1.3 RJ1.4 RJ1.5 RJ1.6 RJ1.7 RJ1.8 RJ1.9 RJ1.10 SCREW1.1 SCREW2.1 SCREW3.1 SCREW4.1 SCREW5.1 SCREW6.1 SCREW7.1 SCREW8.1 SCREW9.1 SCREW10.1 SCREW11.1 SCREW12.1 SCREW13.1 SW1.1 SW1.2 U1.1 U1.2 U1.3 U1.4 U2.A1 U2.A2 U2.A9 U2.A10 U2.B1 U2.B9 U2.B10 U2.C3 U2.C4 U2.C5 U2.C6 U2.C7 U2.C8 U2.D3 U2.D4 U2.D5 U2.D6 U2.D7 U2.D8 U2.E3 U2.E4 U2.E5 U2.E6 U2.E7 U2.E8 U2.F3 U2.F4 U2.F5 U2.F6 U2.F7 U2.F8 U2.G3 U2.G4 U2.G5 U2.G6 U2.G7 U2.G8 U2.H3 U2.H4 U2.H5 U2.H6 U2.H7 U2.H8 U2.J3 U2.J4 U2.J5 U2.J6 U2.J7 U2.J8 U2.K3 U2.K4 U2.K5 U2.K6 U2.K7 U2.K8 U2.L1 U2.L2 U2.L9 U2.L10 U2.M1 U2.M2 U2.M9 U2.M10 U3.1 U3.2 U3.3 U3.4 U3.5 U3.6 U3.7 U3.8 U4.1 U4.2 U4.3 U4.4 U4.5 U4.6 U4.7 U4.8 U4.9 U4.10 U4.11 U4.12 U4.13 U4.14 U4.15 U5.1 U5.2 U5.5 U5.7 U6.1 U6.2 U6.3 U6.4 U6.5 U6.6 U6.7 U6.8 U6.9 U9.1 U9.2 U9.3 U9.4 U9.5 U9.6 U9.7 U9.8 U10.1 U10.2 U10.3 U10.4 U10.5 U10.6 U10.7 U10.8 U11.1 U11.2 U11.3 U11.4 U12.1 U12.2 U12.3 U12.4 U12.5 U12.6 U12.7 U12.8 U13.1 U13.2 U13.3 U13.4 U13.5 U13.6 U13.7 U13.8 U14.1 U14.2 U14.3 U14.4 U15.1 U15.2 U15.3 U15.4 U15.5 U15.6 U15.7 U15.8 U15.9 U15.10 U15.11 U15.12 U15.13 U15.14 U15.15 U15.16 U15.17 U15.18 U15.19 U15.20 U15.21 U15.22 U15.23 U15.24 U15.25 U15.26 U15.27 U15.28 U15.29 U15.30 U15.31 U15.32 U15.33 U16.1 U16.2 U16.3 U16.4 U17.1 U17.2 U17.3 U17.4 U17.5 U17.6 U17.7 U17.8 U17.9 U17.10 U17.11 U17.12 U17.13 U17.14 U17.15 U17.16 U17.17 U17.18 U17.19 U17.20 U17.21 U17.22 U17.23 U17.24 U17.25 U17.26 U17.27 U17.28 U17.29 U17.30 U17.31 U17.32 U17.33 U17.34 U17.35 U17.36 U17.37 U17.38 U17.39 U17.40 U17.41 U17.42 U17.43 U17.44 U17.45 U17.46 U17.47 U17.48 U17.49 U17.50 U17.51 U17.52 U17.53 U17.54 U17.55 U17.56 U17.57 U17.58 U17.59 U17.60 U17.61 U17.62 U17.63 U17.64 U17.65 U17.66 U17.67 U17.68 U17.69 U17.70 U17.71 U17.72 U17.73 U17.74 U17.75 U17.76 U17.77 U17.78 U17.79 U17.80 U17.81 U17.82 U17.83 U17.84 U17.85 U17.86 U17.87 U17.88 U17.89 U17.90 U17.91 U17.92 U17.93 U17.94 U17.95 U17.96 U17.97 U17.98 U17.99 U17.100 U17.101 U17.102 U17.103 U17.104 U17.105 U17.106 U17.107 U17.108 U17.109 U17.110 U17.111 U17.112 U17.113 U17.114 U17.115 U17.116 U17.117 U17.118 U17.119 U17.120 U17.121 U17.122 U17.123 U17.124 U17.125 U17.126 U17.127 U17.128 U17.129 U17.130 U17.131 U17.132 U17.133 U17.134 U17.135 U17.136 U17.137 U17.138 U17.139 U17.140 U17.141 U17.142 U17.143 U17.144 U17.145 U17.146 U17.147 U17.148 U17.149 U17.150 U17.151 U17.152 U17.153 U17.154 U17.155 U17.156 U17.157 U17.158 U17.159 U17.160 U17.161 U17.162 U17.163 U17.164 U17.165 U17.166 U17.167 U17.168 U17.169 U17.170 U17.171 U17.172 U17.173 U17.174 U17.175 U17.176